# Altium PCB OpenAGBoardPart1.PcbDoc
Units mil, origin at the board's own origin, x right, y up, seen from the top; angles counter-clockwise.
Board outline 3937.01 x 3149.61 mil, 2 copper layers (Top, Bottom), stack 61.811 mil thick; 45 components, 39 nets, 189 pads, 37 vias.
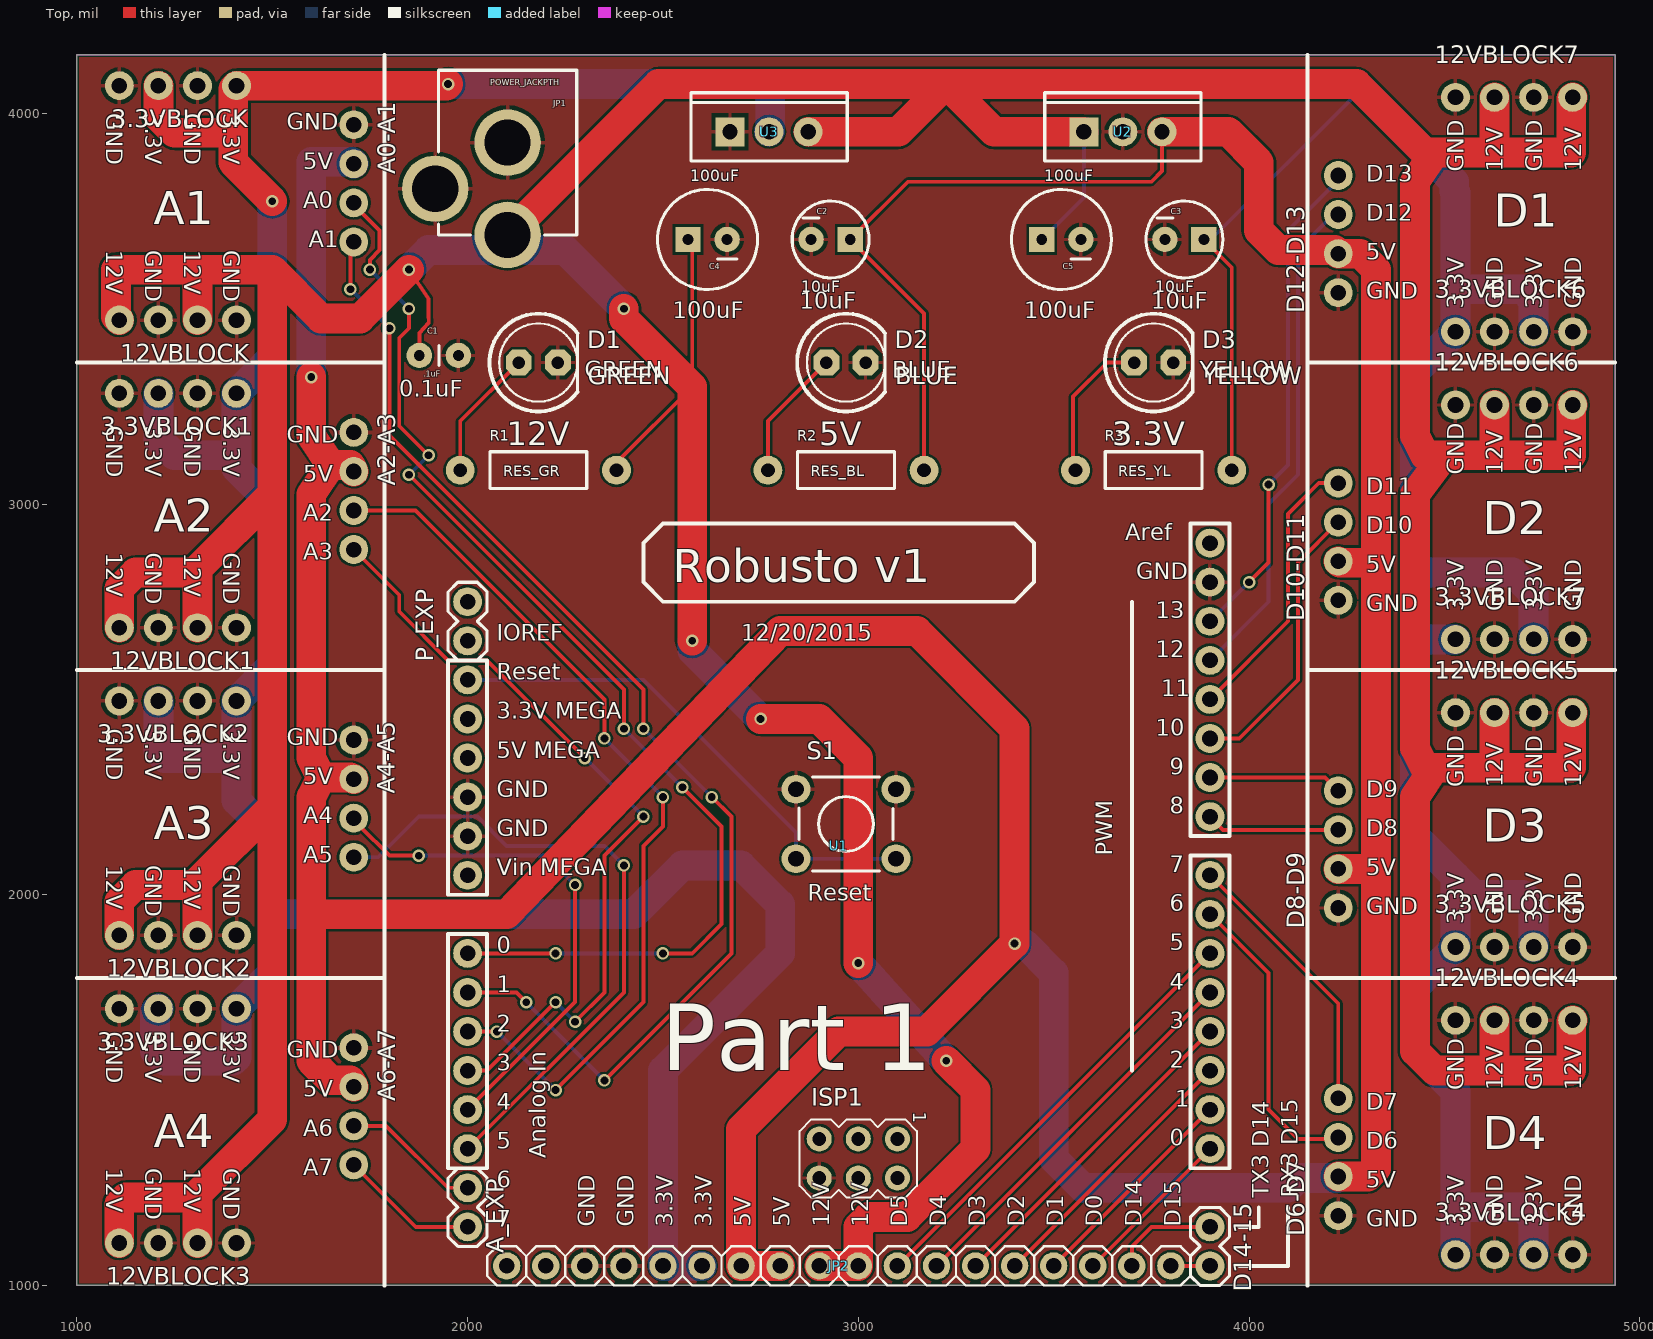
[diagram p0: Top view]
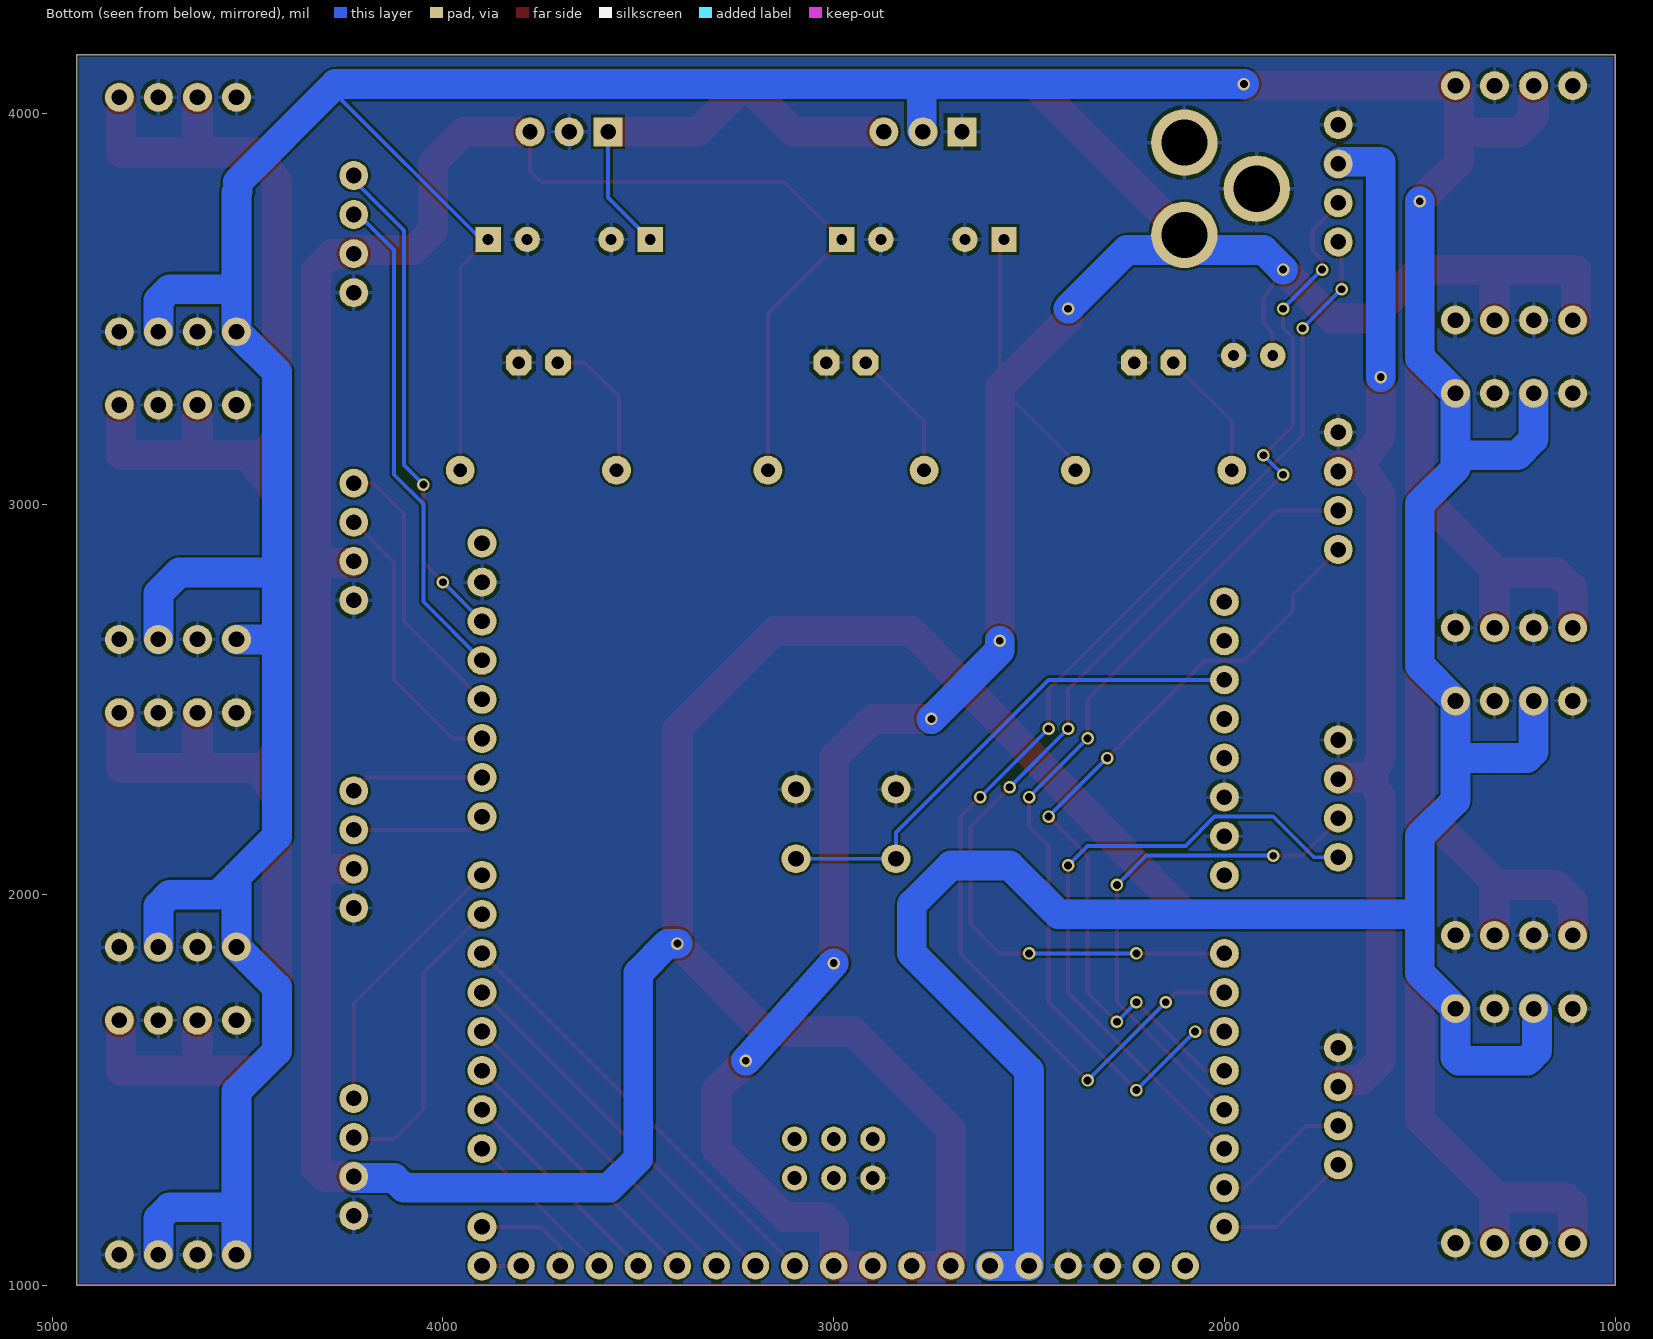
[diagram p1: Bottom view, seen from below]

## Layer stack, top to bottom
Top Solder: solder mask 0.4, Solder Resist, Dk 3.5
Top: signal copper 1.378
Dielectric 1: core 59.0551, FR-4, Dk 4.8
Bottom: signal copper 1.378
Bottom Solder: solder mask 0.4, Solder Resist, Dk 3.5

## Board outline
1000,1000 4937.01,1000 4937.01,4149.61 1000,4149.61

## Design rules (kind name [scope] priority, off if disabled: settings)
Clearance [All] p1: gap=6
Clearance "Clearance (Same Net)" [All] p2: gap=0
HoleSize HoleSize_1 [All] p1: absolutevalues=TRUE maxlimit=100000 minlimit=12 maxpercent=80.000 minpercent=20.000
HoleSize [All] p2: absolutevalues=TRUE maxlimit=100 minlimit=1 maxpercent=80.000 minpercent=20.000
HoleToHoleClearance mdViaViaSameLayer [All] p1: gap=8 allowstackedmicrovias=TRUE
HoleToHoleClearance [All] p2: gap=10 allowstackedmicrovias=TRUE
PasteMaskExpansion mlMinCreamFrame [All] p1: expansion=0
PasteMaskExpansion [All] p2: expansion=0
PolygonConnect ThermalVias [IsVia] p1: connectstyle=Direct reliefconductorwidth=10 reliefentries=4 polygonreliefangle="90 Angle" airgapwidth=10
PolygonConnect [All] p2: connectstyle=Relief reliefconductorwidth=10 reliefentries=4 polygonreliefangle="90 Angle" airgapwidth=10
RoutingVias [All] p1: holewidth=28 width=50 viastyle="Through Hole" minholewidth=28 minwidth=50 maxholewidth=28 maxwidth=50
SilkToSilkClearance [All] p1 off: silktosilkclearance=10
SilkToSolderMaskClearance [IsPad] p1 off: minsilkscreentomaskgap=10 clearancetoexposedcopper=TRUE
SolderMaskExpansion mlMinStopFrame [All] p1: expansion=2
SolderMaskExpansion [All] p2: expansion=4
Width Width_1 [All] p1: maxlimit=100000 minlimit=6 preferedwidth=10
Width [All] p2: maxlimit=10 minlimit=10 preferedwidth=10
25 further rules are at their usual default settings.

## Components (designator, comment, footprint, x,y, rotation, side; value= is the part's Value field where it differs from the comment)
3.3VBLOCK "" 1X04_NO_SILK_ALL_ROUND 1408.66,4070.87 r180 top
3.3VBLOCK1 "" 1X04_NO_SILK_ALL_ROUND 1408.66,3283.46 r180 top
3.3VBLOCK2 "" 1X04_NO_SILK_ALL_ROUND 1408.66,2496.06 r180 top
3.3VBLOCK3 "" 1X04_NO_SILK_ALL_ROUND 1408.66,1708.66 r180 top
3.3VBLOCK4 "" 1X04_NO_SILK_ALL_ROUND 4528.35,1078.74 r0 top
3.3VBLOCK5 "" 1X04_NO_SILK_ALL_ROUND 4528.35,1866.14 r0 top
3.3VBLOCK6 "" 1X04_NO_SILK_ALL_ROUND 4528.35,3440.94 r0 top
3.3VBLOCK7 "" 1X04_NO_SILK_ALL_ROUND 4528.35,2653.54 r0 top
12VBLOCK "" 1X04_NO_SILK_ALL_ROUND 1408.66,3470.87 r180 top
12VBLOCK1 "" 1X04_NO_SILK_ALL_ROUND 1408.66,2683.46 r180 top
12VBLOCK2 "" 1X04_NO_SILK_ALL_ROUND 1408.66,1896.06 r180 top
12VBLOCK3 "" 1X04_NO_SILK_ALL_ROUND 1408.66,1108.66 r180 top
12VBLOCK4 "" 1X04_NO_SILK_ALL_ROUND 4528.35,1678.74 r0 top
12VBLOCK5 "" 1X04_NO_SILK_ALL_ROUND 4528.35,2466.14 r0 top
12VBLOCK6 "" 1X04_NO_SILK_ALL_ROUND 4528.35,3253.54 r0 top
12VBLOCK7 "" 1X04_NO_SILK_ALL_ROUND 4528.35,4040.94 r0 top
A0-A1 "" 1X04_NO_SILK_ALL_ROUND 1708.66,3970.87 r270 top
A2-A3 "" 1X04_NO_SILK_ALL_ROUND 1708.66,3183.46 r270 top
A4-A5 "" 1X04_NO_SILK_ALL_ROUND 1708.66,2396.06 r270 top
A6-A7 "" 1X04_NO_SILK_ALL_ROUND 1708.66,1608.66 r270 top
A_EXP "" 1X02 2000,1250 r270 top
C1 ".1uF" CAP-PTH-SMALL 1876.38,3380.32 r0 top
C2 "10uF" CPOL-RADIAL-10UF-25V 2929.13,3677.17 r0 top
C3 "10uF" CPOL-RADIAL-10UF-25V 3834.65,3677.17 r0 top
C4 "100uF" CPOL-RADIAL-100UF-25V 2614.17,3677.17 r180 top
C5 "100uF" CPOL-RADIAL-100UF-25V 3519.69,3677.17 r180 top
D1 "GREEN" LED5MM 2181.1,3362.2 r0 top
D2 "BLUE" LED5MM 2968.5,3362.2 r0 top
D3 "YELLOW" LED5MM 3755.91,3362.2 r0 top
D6-D7 "" 1X04_NO_SILK_ALL_ROUND 4228.35,1178.74 r90 top
D8-D9 "" 1X04_NO_SILK_ALL_ROUND 4228.35,1966.14 r90 top
D10-D11 "" 1X04_NO_SILK_ALL_ROUND 4228.35,2753.54 r90 top
D12-D13 "" 1X04_NO_SILK_ALL_ROUND 4228.35,3540.94 r90 top
D14-15 "" 1X02 3900,1150 r270 top
ISP1 "" AVRISP 3000,1325 r270 top
JP1 "POWER_JACKPTH" POWER_JACK_PTH 2102.36,4228.35 r180 top
JP2 "" 1X18-BIG 2950,1050 r0 top
P_EXP "" 1X02 2000,2650 r90 top
R1 "RES_GR" AXIAL-0.4 2181.1,3086.61 r0 top
R2 "RES_BL" AXIAL-0.4 2968.5,3086.61 r0 top
R3 "RES_YL" AXIAL-0.4 3755.91,3086.61 r0 top
S1 "" TACTILE-PTH 2968.5,2181.1 r0 top
U1 "" DUEMILANOVE_VIAS 4000,3000 r180 top
U2 "" TO220-IGO 3677.17,3952.76 r0 top
U3 "" TO220-IGO 2771.65,3952.76 r0 top

## Footprints (in the part's own frame and the unit in brackets; to place one, negate y for a bottom-side part, rotate by r counter-clockwise, add the part's x,y. Pads: shape width x height; smd on the part's side, far side on the other; paste and mask are expansions set on the pad)
1X02 [mil] "1X02"
  round 74 hole 40: 1(0,0) 2(100,0)
  silkscreen extent -50,-50 150,50
1X04_NO_SILK_ALL_ROUND [mil] "1X04_NO_SILK_ALL_ROUND"
  round 74 hole 40: 1(0,0) 2(100,0) 3(200,0) 4(300,0)
1X18-BIG [mil] "1X18-BIG"
  round 70 hole 40: 1(-850,0) 2(-750,0) 3(-650,0) 4(-550,0) 5(-450,0) 6(-350,0) 7(-250,0) 8(-150,0) 9(-50,0) 10(50,0) 11(150,0) 12(250,0) 13(350,0) 14(450,0) 15(550,0) 16(650,0) 17(750,0) 18(850,0)
  silkscreen extent -900,-50 900,50
AVRISP [mil] "AVRISP"
  round 64 hole 35.43: 1(-50,100) 2(50,100) 3(-50,0) 4(50,0) 5(-50,-100) 6(50,-100)
  silkscreen extent -100,-150 100,150
AXIAL-0.4 [mil] "AXIAL-0.4"
  round 74 hole 35.43: P$1(-200,0) P$2(200,0)
  silkscreen extent -124,-47 124,47
CAP-PTH-SMALL [mil] "CAP-PTH-SMALL"
  round 65 hole 27.56: 1(0,0) 2(100,0)
  silkscreen extent 50,-25 50,25
CPOL-RADIAL-10UF-25V [mil] "CPOL-RADIAL-10UF-25V"
  rect 65x65 hole 27.56: 1(50,0)
  round 65 hole 27.56: 2(-50,0)
  silkscreen extent -98,-98 98,98
CPOL-RADIAL-100UF-25V [mil] "CPOL-RADIAL-100UF-25V"
  rect 65x65 hole 27.56: 1(50,0)
  round 65 hole 27.56: 2(-50,0)
  silkscreen extent -128,-128 128,128
DUEMILANOVE_VIAS [mil] "DUEMILANOVE_VIAS"
  round 74 hole 40: 3.3V(2000,550) 5V(2000,650) A0(2000,1150) A1(2000,1250) A2(2000,1350) A3(2000,1450) A4(2000,1550) A5(2000,1650) AREF(100,100) D2(100,1450) D3(100,1350) D4(100,1250) D5(100,1150) D6(100,1050) D7(100,950) D8(100,800) D9(100,700) D10(100,600) D11(100,500) D12(100,400) D13(100,300) GND@0(2000,750) GND@1(2000,850) GND@2(100,200) RES(2000,450) RX(100,1650) TX(100,1550) VIN(2000,950)
LED5MM [mil] "LED5MM"
  oct 66x66 hole 32: A(-50,0) K(50,0)
  silkscreen extent -125,-125 100,125
POWER_JACK_PTH [mil] "POWER_JACK_PTH"
  round 170 hole 118: GND(0,303.15) GNDBREAK(185.04,421.26) PWR(0,539.37)
  silkscreen extent -177,118 177,539
TACTILE-PTH [mil] "TACTILE-PTH"
  round 74 hole 40: 1(-128,89) 2(128,89) 3(-128,-89) 4(128,-89)
  silkscreen extent -120,-120 120,120
TO220-IGO [mil] "TO220-IGO"
  round 74 hole 39.37: GND(0,0) OUT(100,0)
  rect 74x74 hole 39.37: IN(-100,0)
  silkscreen extent -200,-75 200,100

## Part data
3.3VBLOCK 3.3VBLOCK1 3.3VBLOCK2 3.3VBLOCK3 3.3VBLOCK4 3.3VBLOCK5 3.3VBLOCK6 3.3VBLOCK7 12VBLOCK 12VBLOCK1 12VBLOCK2 12VBLOCK3 12VBLOCK4 12VBLOCK5 12VBLOCK6 12VBLOCK7 A0-A1 A2-A3 A4-A5 A6-A7 D6-D7 D8-D9 D10-D11 D12-D13: library part 1X04_NO_SILK_ALL_ROUND
A_EXP D14-15 P_EXP: library part 1X02
C1: library part CAP-PTH-SMALL
C2 C3: library part CPOL-RADIAL-10UF-25V
C4 C5: library part CPOL-RADIAL-100UF-25V
D1 D2 D3: library part LED5MM
ISP1: library part AVRISP
JP1: library part POWER_JACK_PTH
JP2: library part 1X18-BIG
R1 R2 R3: library part AXIAL-0.4
S1: library part TACTILE-PTH
U1: library part DUEMILANOVE_VIAS
U2 U3: library part TO220-IGO

## Via types
v1: diameter 32/32 (per signal layer), hole 20, Top to Bottom, 37 vias

## Nets (pads, with @x,y where several pads share a name; then routed paths per layer and width w, separated by ;. In a path a pad name is that pad's centre, name@x,y a point inside that pad or via, vN(x,y) a via of type N, cw(c..) or ccw(c..) an arc to the next point about the centre after c; other vN are vias at no path point)
3.3V: 3.3VBLOCK1.1 3.3VBLOCK1.3 3.3VBLOCK2.1 3.3VBLOCK2.3 3.3VBLOCK3.1 3.3VBLOCK3.3 3.3VBLOCK4.1 3.3VBLOCK4.3 3.3VBLOCK5.1 3.3VBLOCK5.3 3.3VBLOCK6.1 3.3VBLOCK6.3 3.3VBLOCK7.1 3.3VBLOCK7.3 3.3VBLOCK.1 3.3VBLOCK.3 C3.1 JP2.5 JP2.6 R3.P$2 U3.GND | length 15486.1
  Top w10: C3.1 3955.91,3605.91 R3.P$2
  Top w76: 3.3VBLOCK.3 1208.66,3991.34 1250,3950 1400,3950 ; v1(1500,3775) 1400,3875 1400,3950 ; v1(1950,4075) 1945.87,4070.87 3.3VBLOCK.1 1400,4062.2 1400,3950
  Bottom w10: C3.1 3902.17,3677.17 4287.5,4062.5
  Bottom w76: 3.3VBLOCK3.3 1200,1700 1200,1600 1225,1575 1400,1575 1408.66,1583.66 3.3VBLOCK3.1 1500,1800 1500,1950 ; 3.3VBLOCK2.3 1208.66,2366.34 1225,2350 1408.66,2350 ; 3.3VBLOCK1.3 1208.66,3166.34 1250,3125 1408.66,3125 ; v1(1500,3775) 1500,3374.8 3.3VBLOCK1.1 1408.66,3125 ; v1(1950,4075) 2775,4075 ; JP2.6 JP2.5 2500,1550 2800,1850 2800,1975 2700,2075 2550,2075 2425,1950 1500,1950 ; U3.GND 2775,3956.1 2775,4075 ; 3.3VBLOCK4.1 4528.35,1200 ; 3.3VBLOCK7.1 4428.54,2653.54 4425,2650 ; 3.3VBLOCK4.3 4728.35,1171.65 4700,1200 4528.35,1200 ; 3.3VBLOCK5.3 4728.35,1971.65 4700,2000 4575,2000 4528.35,2046.65 ; 3.3VBLOCK7.3 4728.35,2771.65 4675,2825 4425,2825 ; 3.3VBLOCK6.3 4728.35,3521.65 4700,3550 4528.35,3550 ; 1408.66,2350 3.3VBLOCK2.1 1500,2587.4 1500,3000 1408.66,3091.34 1408.66,3125 ; 1408.66,2350 1408.66,2241.34 1500,2150 1500,1950 ; 2775,4075 4275,4075 4287.5,4062.5 4525,3825 4525,3800 4528.35,3796.65 4528.35,3550 ; 4425,2650 4425,2825 ; 4425,2650 4425,2150 4528.35,2046.65 ; 4425,2825 4425,3337.6 3.3VBLOCK6.1 4528.35,3550 ; 4528.35,1200 4528.35,1496.65 4425,1600 4425,1762.8 3.3VBLOCK5.1 4528.35,2046.65
3V3: U1.3.3V
5V: A0-A1.2 A2-A3.2 A4-A5.2 A6-A7.2 C2.1 D6-D7.2 D8-D9.2 D10-D11.2 D12-D13.2 JP2.7 JP2.8 R2.P$2 U2.OUT | length 13267
  Top w10: R2.P$2 3168.5,3487.8 C2.1 3126.97,3825 3750,3825 3777.17,3852.17 U2.OUT
  Top w76: v1(1600,3325) 1600,3175 1650,3100 ; A6-A7.2 1700,1525 1650,1525 1600,1575 1600,1950 ; A4-A5.2 1700,2300 1625,2300 ; A2-A3.2 1700,3100 1650,3100 ; JP2.8 JP2.7 2700,1400 2950,1650 3175,1650 v1(3400,1875) 3400,2425 3150,2675 2800,2675 2100,1950 1600,1950 ; U2.OUT 3947.24,3952.76 4025,3875 4025,3700 4075,3650 4219.29,3650 D12-D13.2 4284.06,3640.94 4325,3600 4325,2850 ; D6-D7.2 4303.74,1278.74 4325,1300 4325,2057.28 4316.14,2066.14 ; D8-D9.2 4316.14,2066.14 ; D10-D11.2 4231.89,2850 4325,2850 ; 1600,1950 1600,2250 1625,2300 ; 1625,2300 1600,2350 1600,3025 1650,3100 ; 4316.14,2066.14 4325,2075 4325,2850
  Bottom w76: v1(1600,3325) 1600,3876 1703.53,3876 A0-A1.2 ; v1(3400,1875) 3425,1875 3500,1800 3500,1325 3575,1250 4100,1250 4125,1275 4224.61,1275 D6-D7.2
5V0: U1.5V
12V: 12VBLOCK1.2 12VBLOCK1.4 12VBLOCK2.2 12VBLOCK2.4 12VBLOCK3.2 12VBLOCK3.4 12VBLOCK4.2 12VBLOCK4.4 12VBLOCK5.2 12VBLOCK5.4 12VBLOCK6.2 12VBLOCK6.4 12VBLOCK7.2 12VBLOCK7.4 12VBLOCK.2 12VBLOCK.4 C1.1 C4.1 C5.1 JP1.PWR JP2.9 JP2.10 R1.P$2 U2.IN U3.OUT | length 18958.2
  Top w10: v1(1850,3600) 1900,3525 1900,3487.5 1900.49,3462.99 1876.38,3437.99 C1.1 ; R1.P$2 2381.1,3106.1 2575,3300 2575,3666.34 C4.1
  Top w76: 12VBLOCK3.4 1108.66,1208.66 1125,1225 1308.66,1225 ; 12VBLOCK2.4 1108.66,1983.66 1150,2025 1308.66,2025 ; 12VBLOCK1.4 1108.66,2783.66 1150,2825 1300,2825 1308.66,2833.66 ; 12VBLOCK.4 1100,3479.53 1100,3600 1325,3600 ; 12VBLOCK3.2 1308.66,1225 ; 12VBLOCK2.2 1308.66,2025 ; 12VBLOCK1.2 1308.66,2833.66 ; 12VBLOCK.2 1308.66,3583.66 1325,3600 ; v1(1850,3600) 1725,3475 1625,3475 1500,3600 ; JP1.PWR 2488.39,4075 3225,4075 ; v1(2400,3500) 2400,3475 2575,3300 v1(2575,2650) ; v1(2750,2450) 2900,2450 3000,2350 v1(3000,1825) ; U3.OUT 3102.76,3952.76 3225,4075 ; JP2.9 JP2.10 3000,1150 3025,1175 3125,1175 3300,1350 3300,1500 v1(3225,1575) ; U2.IN 3347.24,3952.76 3225,4075 ; 12VBLOCK4.2 4628.35,1553.35 4625,1550 ; 12VBLOCK5.2 4628.35,2328.35 4625,2325 ; 12VBLOCK6.2 4628.35,3128.35 4625,3125 ; 12VBLOCK7.2 4628.35,3903.35 4625,3900 ; 12VBLOCK4.4 4825,1675.39 4825,1550 4625,1550 ; 12VBLOCK5.4 4825,2462.8 4825,2325 4625,2325 ; 12VBLOCK6.4 4825,3250.2 4825,3125 4625,3125 ; 12VBLOCK7.4 4825,4037.6 4825,3900 4625,3900 ; 1308.66,1225 1308.66,1233.66 1500,1425 1500,2225 ; 1308.66,2025 1308.66,2033.66 1500,2225 ; 1308.66,2833.66 1500,3025 ; 1325,3600 1500,3600 ; 1500,2225 1500,3025 ; 1500,3025 1500,3600 ; 3225,4075 4275,4075 4450,3900 4475,3900 ; 4475,2325 4450,2325 4425,2375 4425,3025 4500,3125 ; 4475,2325 4625,2325 ; 4475,2325 4425,2250 4425,1600 4475,1550 4625,1550 ; 4475,3900 4625,3900 ; 4475,3900 4425,3825 4425,3175 4450,3125 4500,3125 ; 4500,3125 4625,3125
  Bottom w10: C5.1 3577.17,3784.65 U2.IN
  Bottom w76: v1(1850,3600) 1900,3650 JP1.PWR@2141.34,3650 ; JP1.PWR JP1.PWR@2141.34,3650 ; v1(2400,3500) 2250,3650 JP1.PWR@2141.34,3650 ; v1(2575,2650) 2575,2625 v1(2750,2450) ; v1(3000,1825) v1(3225,1575)
A0: A0-A1.3 U1.A0 | length 2998.6
  Top w10: A0-A1.3 1725,3750 1775,3700 1775,3650 1750,3625 v1(1750,3600) ; v1(1850,3075) 2400,2525 v1(2400,2425) ; v1(1850,3500) 1850,3450 1825,3425 1825,3200 v1(1900,3125) ; U1.A0 v1(2225,1850) ; v1(2500,1850) 2575,1850 2650,1925 2650,2175 v1(2550,2275)
  Bottom w10: v1(1750,3600) v1(1850,3500) ; v1(1850,3075) v1(1900,3125) ; v1(2225,1850) v1(2500,1850) ; v1(2400,2425) v1(2550,2275)
A1: A0-A1.4 U1.A1 | length 3129.3
  Top w10: v1(1700,3550) 1700,3650 A0-A1.4 ; v1(1800,3450) 1800,3175 2450,2525 v1(2450,2425) ; U1.A1 2125,1750 v1(2150,1725) ; v1(2350,1525) 2675,1850 2675,2200 v1(2625,2250)
  Bottom w10: v1(1700,3550) v1(1800,3450) ; v1(2150,1725) v1(2350,1525) ; v1(2450,2425) v1(2625,2250)
A2: A2-A3.3 U1.A2 | length 2304.8
  Top w10: A2-A3.3 1866.54,2983.46 2350,2500 v1(2350,2400) ; U1.A2 v1(2075,1650) ; v1(2225,1500) 2450,1725 2450,2125 2500,2175 v1(2500,2250)
  Bottom w10: v1(2075,1650) v1(2225,1500) ; v1(2350,2400) v1(2500,2250)
A3: A2-A3.4 U1.A3 | length 2014.8
  Top w10: A2-A3.4 1825,2767.13 1825,2725 1950,2600 2050,2600 v1(2300,2350) ; U1.A3 2050,1550 v1(2225,1725) ; v1(2275,1675) 2350,1750 2350,2100 v1(2450,2200)
  Bottom w10: v1(2225,1725) v1(2275,1675) ; v1(2300,2350) v1(2450,2200)
A4: A4-A5.3 U1.A4 | length 1327.7
  Top w10: A4-A5.3 1725,2175 1800,2100 v1(1875,2100) ; U1.A4 2275,1725 v1(2275,2025)
  Bottom w10: v1(1875,2100) 2200,2100 v1(2275,2025)
A5: A4-A5.4 U1.A5 | length 1676.9
  Top w10: U1.A5 2400,1750 v1(2400,2075)
  Bottom w10: A4-A5.4 1771.06,2096.06 1875,2200 2025,2200 2100,2125 2350,2125 v1(2400,2075)
A6: A6-A7.3 A_EXP.1 | length 357.1
  Top w10: A6-A7.3 1791.34,1408.66 1950,1250 A_EXP.1
A7: A6-A7.4 A_EXP.2 | length 357.1
  Top w10: A6-A7.4 1867.32,1150 A_EXP.2
AREF: U1.AREF
CONTINUITY_STRIP: JP2.1
D0: JP2.16 U1.RX | length 424.3
  Top w10: JP2.16 U1.RX
D1: JP2.15 U1.TX | length 565.7
  Top w10: JP2.15 U1.TX
D2: JP2.14 U1.D2 | length 707.1
  Top w10: JP2.14 U1.D2
D3: JP2.13 U1.D3 | length 848.5
  Top w10: JP2.13 U1.D3
D4: JP2.12 U1.D4 | length 989.9
  Top w10: JP2.12 U1.D4
D5: JP2.11 U1.D5 | length 1131.4
  Top w10: JP2.11 U1.D5
D6: D6-D7.3 U1.D6 | length 773.1
  Top w10: U1.D6 4050,1800 4050,1450 4125,1375 4224.61,1375 D6-D7.3
D7: D6-D7.4 U1.D7 | length 707.3
  Top w10: U1.D7 4228.35,1721.65 D6-D7.4
D8: D8-D9.3 U1.D8 | length 342.4
  Top w10: U1.D8 3933.86,2166.14 D8-D9.3
D9: D8-D9.4 U1.D9 | length 342.4
  Top w10: U1.D9 4194.49,2300 D8-D9.4
D10: D10-D11.3 U1.D10 | length 733.5
  Top w10: U1.D10 3975,2400 4125,2550 4125,2850.2 D10-D11.3
D11: D10-D11.4 U1.D11 | length 718.7
  Top w10: U1.D11 4100,2700 4100,2975 4178.54,3053.54 D10-D11.4
D12: D12-D13.3 U1.D12 | length 1284.2
  Bottom w10: U1.D12 4050,2750 4050,3000 4125,3075 4125,3650 4215.94,3740.94 D12-D13.3
D13: D12-D13.4 U1.D13 | length 1318.4
  Top w10: v1(4000,2800) 4050,2850 v1(4050,3050)
  Bottom w10: U1.D13 v1(4000,2800) ; v1(4050,3050) 4100,3100 4100,3700 4250,3850 D12-D13.4
D14: D14-15.1 JP2.17 | length 270.7
  Top w10: JP2.17 3700,1100 3750,1150 D14-15.1
D15: D14-15.2 JP2.18 | length 100
  Top w10: JP2.18 D14-15.2
GND: 3.3VBLOCK1.2 3.3VBLOCK1.4 3.3VBLOCK2.2 3.3VBLOCK2.4 3.3VBLOCK3.2 3.3VBLOCK3.4 3.3VBLOCK4.2 3.3VBLOCK4.4 3.3VBLOCK5.2 3.3VBLOCK5.4 3.3VBLOCK6.2 3.3VBLOCK6.4 3.3VBLOCK7.2 3.3VBLOCK7.4 3.3VBLOCK.2 3.3VBLOCK.4 12VBLOCK1.1 12VBLOCK1.3 12VBLOCK2.1 12VBLOCK2.3 12VBLOCK3.1 12VBLOCK3.3 12VBLOCK4.1 12VBLOCK4.3 12VBLOCK5.1 12VBLOCK5.3 12VBLOCK6.1 12VBLOCK6.3 12VBLOCK7.1 12VBLOCK7.3 12VBLOCK.1 12VBLOCK.3 A0-A1.1 A2-A3.1 A4-A5.1 A6-A7.1 C1.2 C2.2 C3.2 C4.2 C5.2 D1.K D2.K D3.K D6-D7.1 D8-D9.1 D10-D11.1 D12-D13.1 ISP1.6 JP1.GND JP1.GNDBREAK JP2.3 JP2.4 S1.1 S1.2 U1.GND@0 U1.GND@1 U1.GND@2 U2.GND U3.IN
N$1: D1.A R1.P$1 | length 337.7
  Top w10: R1.P$1 1981.1,3212.2 D1.A
N$2: D2.A R2.P$1 | length 337.7
  Top w10: R2.P$1 2768.5,3212.2 D2.A
N$3: D3.A R3.P$1 | length 382.9
  Top w10: R3.P$1 3550,3092.52 3550,3275 3637.2,3362.2 D3.A
N$5: JP2.2
RES: S1.3 S1.4 U1.RES | length 1325.7
  Bottom w10: U1.RES 2450,2550 2840.5,2159.5 S1.3 S1.4
VCC: ISP1.2
VIN: U1.VIN
pads on no net: ISP1.1 ISP1.3 ISP1.4 ISP1.5 P_EXP.1 P_EXP.2

## Polygon pours and split planes (outlines as drawn)
GND on Top "Top-GND" (hatched 90Degree grid 0.1 track 0.1, remove dead copper, pour order 0): 995,995 4942.01,995 4942.01,4154.61 995,4154.61
GND on Bottom "Bottom-GND" (hatched 90Degree grid 0.1 track 0.1, remove dead copper, pour order 2): 995,995 4942.01,995 4942.01,4154.61 995,4154.61

## Keep-outs
Keep-Out Layer:
  the board outline again, w0.32

## Silkscreen, mask and mechanical layers (free items; w line width, h text height)
Top Overlay:
  lines w10: 1000,1787.4 1787.4,1787.4 ; 1000,2574.8 1787.4,2574.8 ; 1000,3362.2 1787.4,3362.2 ; 1787.4,1000 1787.4,1787.4 ; 1787.4,4149.61 1787.4,3362.2 ; 3700,1550 3700,2750 ; 3975,1050 4100,1050 4100,1200 ; 3975,1150 4025,1150 4025,1200 ; 4149.61,1000 4149.61,1787.4 ; 4149.61,4149.61 4149.61,3362.2 ; 4937.01,1787.4 4149.61,1787.4 ; 4937.01,2574.8 4149.61,2574.8 ; 4937.01,3362.2 4149.61,3362.2 ; 1787.4,1787.4 1787.4,2574.8 ; 1787.4,2574.8 1787.4,3362.2 ; 4149.61,1787.4 4149.61,2574.8 ; 4149.61,2574.8 4149.61,3362.2 ; 1950,1300 2050,1300 2050,1900 1950,1900 1950,1300 ; 1950,2000 2050,2000 2050,2600 1950,2600 1950,2000 ; 2450,2800 2500,2750 3400,2750 3450,2800 3450,2900 3400,2950 2500,2950 2450,2900 2450,2800 ; 3850,1300 3950,1300 3950,2100 3850,2100 3850,1300 ; 3850,2150 3950,2150 3950,2950 3850,2950 3850,2150
  text "GND" at 1075,4000 h42.5 r270
  text "3.3V" at 1175,4000 h42.5 r270
  text "GND" at 1275,4000 h42.5 r270
  text "3.3V" at 1375,4000 h42.5 r270
  text "GND" at 1536.7,3957.51 h42.5
  text "5V" at 1579.19,3857.51 h42.5
  text "GND" at 4550,3850 h42.5 r90
  text "12V" at 4650,3850 h42.5 r90
  text "GND" at 4750,3850 h42.5 r90
  text "12V" at 4850,3850 h42.5 r90
  text "D13" at 4300,3825 h42.5
  text "A0" at 1579.19,3757.51 h42.5
  text "D12" at 4300,3725 h42.5
  text "A1" at 1196.85,3716.54 h85
  text "D1" at 4626.86,3710.31 h85
  text "A1" at 1593.35,3657.51 h42.5
  text "12V" at 1075,3650 h42.5 r270
  text "GND" at 1175,3650 h42.5 r270
  text "12V" at 1275,3650 h42.5 r270
  text "GND" at 1375,3650 h42.5 r270
  text "5V" at 4300,3625 h42.5
  text "GND" at 4300,3525 h42.5
  text "10uF" at 2850,3500 h42.5
  text "10uF" at 3750,3500 h42.5
  text "3.3V" at 4550,3500 h42.5 r90
  text "GND" at 4650,3500 h42.5 r90
  text "3.3V" at 4750,3500 h42.5 r90
  text "GND" at 4850,3500 h42.5 r90
  text "100uF" at 2525,3475 h42.5
  text "100uF" at 3425,3475 h42.5
  text "GREEN" at 2299.21,3322.83 h42.5
  text "BLUE" at 3086.61,3322.83 h42.5
  text "YELLOW" at 3874.02,3322.83 h42.5
  text "0.1uF" at 1825,3275 h42.5
  text "GND" at 1075,3200 h42.5 r270
  text "3.3V" at 1175,3200 h42.5 r270
  text "GND" at 1275,3200 h42.5 r270
  text "3.3V" at 1375,3200 h42.5 r270
  text "GND" at 1536.7,3157.51 h42.5
  text "12V" at 2100,3150 h59.5
  text "5V" at 2900,3150 h59.5
  text "3.3V" at 3650,3150 h59.5
  text "GND" at 4550,3075 h42.5 r90
  text "12V" at 4650,3075 h42.5 r90
  text "GND" at 4750,3075 h42.5 r90
  text "12V" at 4850,3075 h42.5 r90
  text "5V" at 1579.19,3057.51 h42.5
  text "D11" at 4300,3025 h42.5
  text "A2" at 1579.19,2957.51 h42.5
  text "A2" at 1196.85,2929.13 h85
  text "D10" at 4300,2925 h42.5
  text "D2" at 4598.54,2922.9 h85
  text "Aref" at 3683.38,2907.51 h42.5
  text "12V" at 1075,2875 h42.5 r270
  text "GND" at 1175,2875 h42.5 r270
  text "12V" at 1275,2875 h42.5 r270
  text "GND" at 1375,2875 h42.5 r270
  text "A3" at 1579.19,2857.51 h42.5
  text "5V" at 4300,2825 h42.5
  text "GND" at 3711.7,2807.51 h42.5
  text "Robusto v1" at 2525,2800 h85
  text "GND" at 4300,2725 h42.5
  text "3.3V" at 4550,2725 h42.5 r90
  text "GND" at 4650,2725 h42.5 r90
  text "3.3V" at 4750,2725 h42.5 r90
  text "GND" at 4850,2725 h42.5 r90
  text "13" at 3761.27,2707.51 h42.5
  text "IOREF" at 2075,2650 h42.5
  text "12/20/2015" at 2700,2650 h42.5
  text "12" at 3761.27,2607.51 h42.5
  text "Reset" at 2075,2550 h42.5
  text "11" at 3775.43,2507.51 h42.5
  text "3.3V MEGA" at 2075,2450 h42.5
  text "GND" at 1075,2425 h42.5 r270
  text "3.3V" at 1175,2425 h42.5 r270
  text "GND" at 1275,2425 h42.5 r270
  text "3.3V" at 1375,2425 h42.5 r270
  text "10" at 3761.27,2407.51 h42.5
  text "GND" at 1536.7,2382.51 h42.5
  text "5V MEGA" at 2075,2350 h42.5
  text "9" at 3796.68,2307.51 h42.5
  text "5V" at 1579.19,2282.51 h42.5
  text "GND" at 4550,2275 h42.5 r90
  text "12V" at 4650,2275 h42.5 r90
  text "GND" at 4750,2275 h42.5 r90
  text "12V" at 4850,2275 h42.5 r90
  text "GND" at 2075,2250 h42.5
  text "D9" at 4300,2250 h42.5
  text "8" at 3796.68,2207.51 h42.5
  text "A4" at 1579.19,2182.51 h42.5
  text "GND" at 2075,2150 h42.5
  text "D8" at 4300,2150 h42.5
  text "A3" at 1196.85,2141.73 h85
  text "D3" at 4598.54,2135.5 h85
  text "PWM" at 3650,2100 h42.5 r90
  text "A5" at 1579.19,2082.51 h42.5
  text "12V" at 1075,2075 h42.5 r270
  text "GND" at 1175,2075 h42.5 r270
  text "12V" at 1275,2075 h42.5 r270
  text "GND" at 1375,2075 h42.5 r270
  text "7" at 3796.68,2057.51 h42.5
  text "Vin MEGA" at 2075,2050 h42.5
  text "5V" at 4300,2050 h42.5
  text "Reset" at 2870.08,1984.25 h42.5
  text "6" at 3796.68,1957.51 h42.5
  text "GND" at 4300,1950 h42.5
  text "3.3V" at 4550,1925 h42.5 r90
  text "GND" at 4650,1925 h42.5 r90
  text "3.3V" at 4750,1925 h42.5 r90
  text "GND" at 4850,1925 h42.5 r90
  text "5" at 3796.68,1857.51 h42.5
  text "0" at 2075,1850 h42.5
  text "4" at 3796.68,1757.51 h42.5
  text "1" at 2075,1750 h42.5
  text "3" at 3796.68,1657.51 h42.5
  text "GND" at 1075,1650 h42.5 r270
  text "3.3V" at 1175,1650 h42.5 r270
  text "GND" at 1275,1650 h42.5 r270
  text "3.3V" at 1375,1650 h42.5 r270
  text "2" at 2075,1650 h42.5
  text "GND" at 1536.7,1582.51 h42.5
  text "2" at 3796.68,1557.51 h42.5
  text "Part 1" at 2496.06,1551.18 h170
  text "3" at 2075,1550 h42.5
  text "GND" at 4550,1500 h42.5 r90
  text "12V" at 4650,1500 h42.5 r90
  text "GND" at 4750,1500 h42.5 r90
  text "12V" at 4850,1500 h42.5 r90
  text "5V" at 1579.19,1482.51 h42.5
  text "1" at 3810.84,1457.51 h42.5
  text "4" at 2075,1450 h42.5
  text "D7" at 4300,1450 h42.5
  text "A6" at 1579.19,1382.51 h42.5
  text "0" at 3796.68,1357.51 h42.5
  text "A4" at 1196.85,1354.33 h85
  text "5" at 2075,1350 h42.5
  text "D6" at 4300,1350 h42.5
  text "D4" at 4598.54,1348.1 h85
  text "Analog In" at 2200,1325 h42.5 r90
  text "12V" at 1075,1300 h42.5 r270
  text "GND" at 1175,1300 h42.5 r270
  text "12V" at 1275,1300 h42.5 r270
  text "GND" at 1375,1300 h42.5 r270
  text "A7" at 1579.19,1282.51 h42.5
  text "6" at 2075,1250 h42.5
  text "5V" at 4300,1250 h42.5
  text "TX3 D14" at 4050,1225 h42.5 r90
  text "RX3 D15" at 4125,1225 h42.5 r90
  text "7" at 2075,1150 h42.5
  text "GND" at 2325,1150 h42.5 r90
  text "GND" at 2425,1150 h42.5 r90
  text "3.3V" at 2525,1150 h42.5 r90
  text "3.3V" at 2625,1150 h42.5 r90
  text "5V" at 2725,1150 h42.5 r90
  text "5V" at 2825,1150 h42.5 r90
  text "12V" at 2925,1150 h42.5 r90
  text "12V" at 3025,1150 h42.5 r90
  text "D5" at 3125,1150 h42.5 r90
  text "D4" at 3225,1150 h42.5 r90
  text "D3" at 3325,1150 h42.5 r90
  text "D2" at 3425,1150 h42.5 r90
  text "D1" at 3525,1150 h42.5 r90
  text "D0" at 3625,1150 h42.5 r90
  text "D14" at 3725,1150 h42.5 r90
  text "D15" at 3825,1150 h42.5 r90
  text "GND" at 4300,1150 h42.5
  text "3.3V" at 4550,1150 h42.5 r90
  text "GND" at 4650,1150 h42.5 r90
  text "3.3V" at 4750,1150 h42.5 r90
  text "GND" at 4850,1150 h42.5 r90
Dimension:
  the board outline again, w0.32

## Text inside footprints (layer, text, board x,y; h text height)
ISP1: Top Overlay "1" at 3140,1445 h34 r270
U1: tDocu "GND" at 2042,2230 h62; tDocu "GND" at 2042,2130 h62; tDocu "+5V" at 2042,2330 h62; tDocu "Reset" at 2042,2530 h62; tDocu "Vin" at 2042,2030 h62; tDocu "+3.3V" at 2042,2430 h62; tDocu "0" at 2042,1830 h62; tDocu "1" at 2042,1730 h62; tDocu "2" at 2042,1630 h62; tDocu "3" at 2042,1530 h62; tDocu "4" at 2042,1430 h62; tDocu "5" at 2042,1330 h62; tDocu "Analog In" at 2142,1445 h62 r90; tDocu "GND" at 3850,2820 h62 r180; tDocu "13" at 3850,2720 h62 r180; tDocu "12" at 3850,2620 h62 r180; tDocu "11" at 3850,2520 h62 r180; tDocu "Aref" at 3850,2920 h62 r180; tDocu "10" at 3850,2420 h62 r180; tDocu "9" at 3850,2320 h62 r180; tDocu "8" at 3850,2220 h62 r180; tDocu "7" at 3850,2070 h62 r180; tDocu "6" at 3850,1970 h62 r180; tDocu "5" at 3850,1870 h62 r180; tDocu "4" at 3850,1770 h62 r180; tDocu "3" at 3850,1670 h62 r180; tDocu "2" at 3850,1570 h62 r180; tDocu "TX" at 3850,1470 h62 r180; tDocu "RX" at 3850,1370 h62 r180; tDocu "PWM" at 3731.89,2520 h62 r180; tDocu "PWM" at 3731.89,2420 h62 r180; tDocu "PWM" at 3731.89,2320 h62 r180; tDocu "PWM" at 3731.89,1970 h62 r180; tDocu "PWM" at 3731.89,1870 h62 r180; tDocu "PWM" at 3731.89,1670 h62 r180